# EAGLE board GnZC - POC (EAGLE 9.6.2)
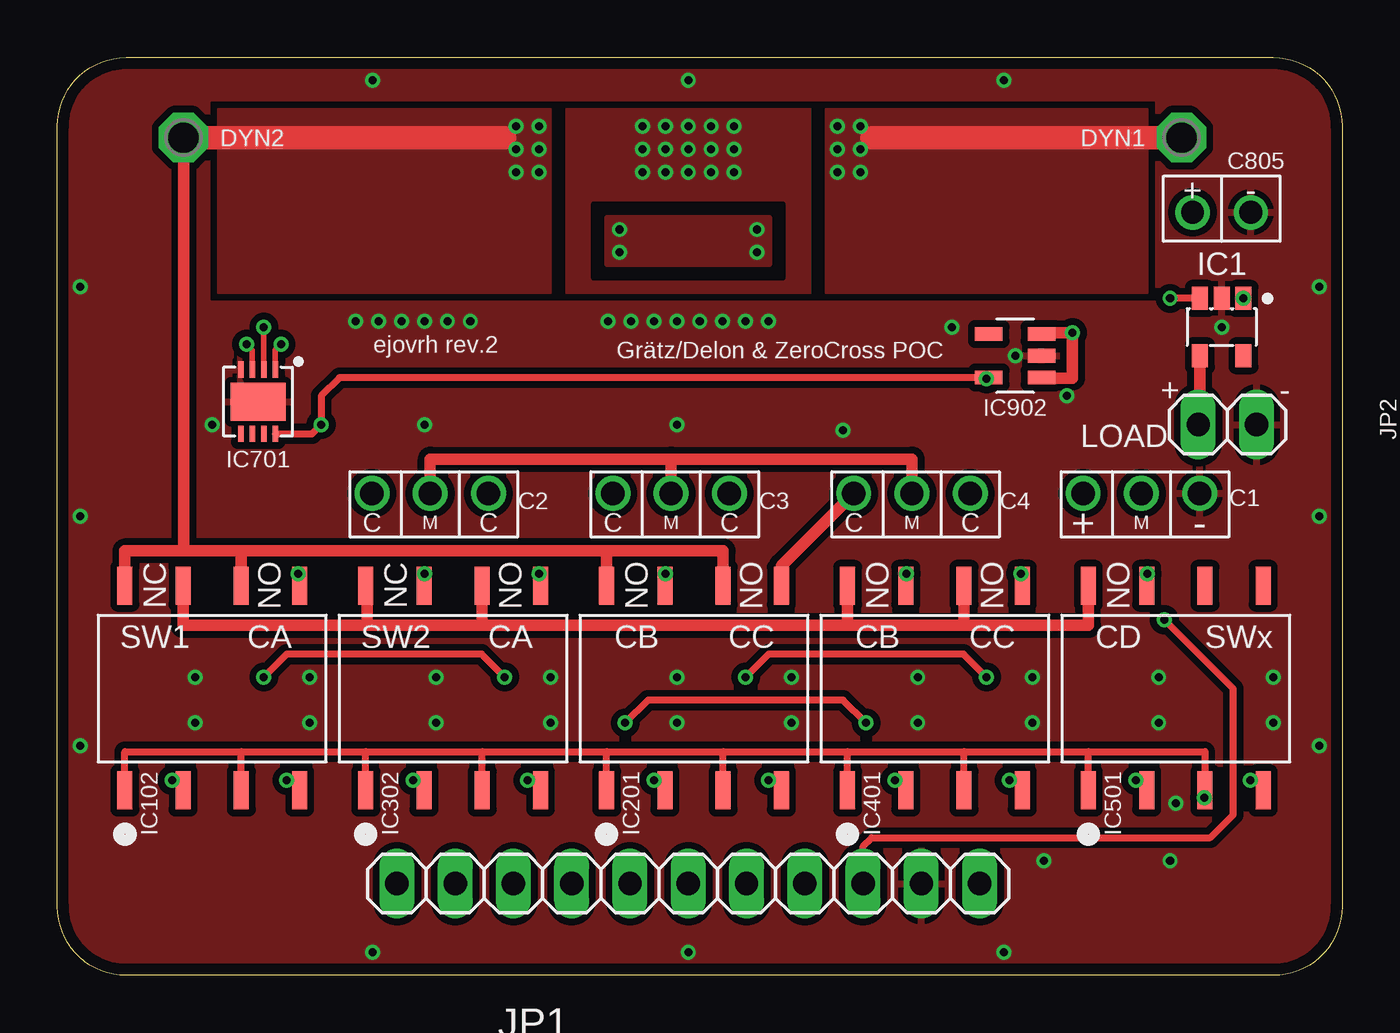
[diagram p0: board, top side]
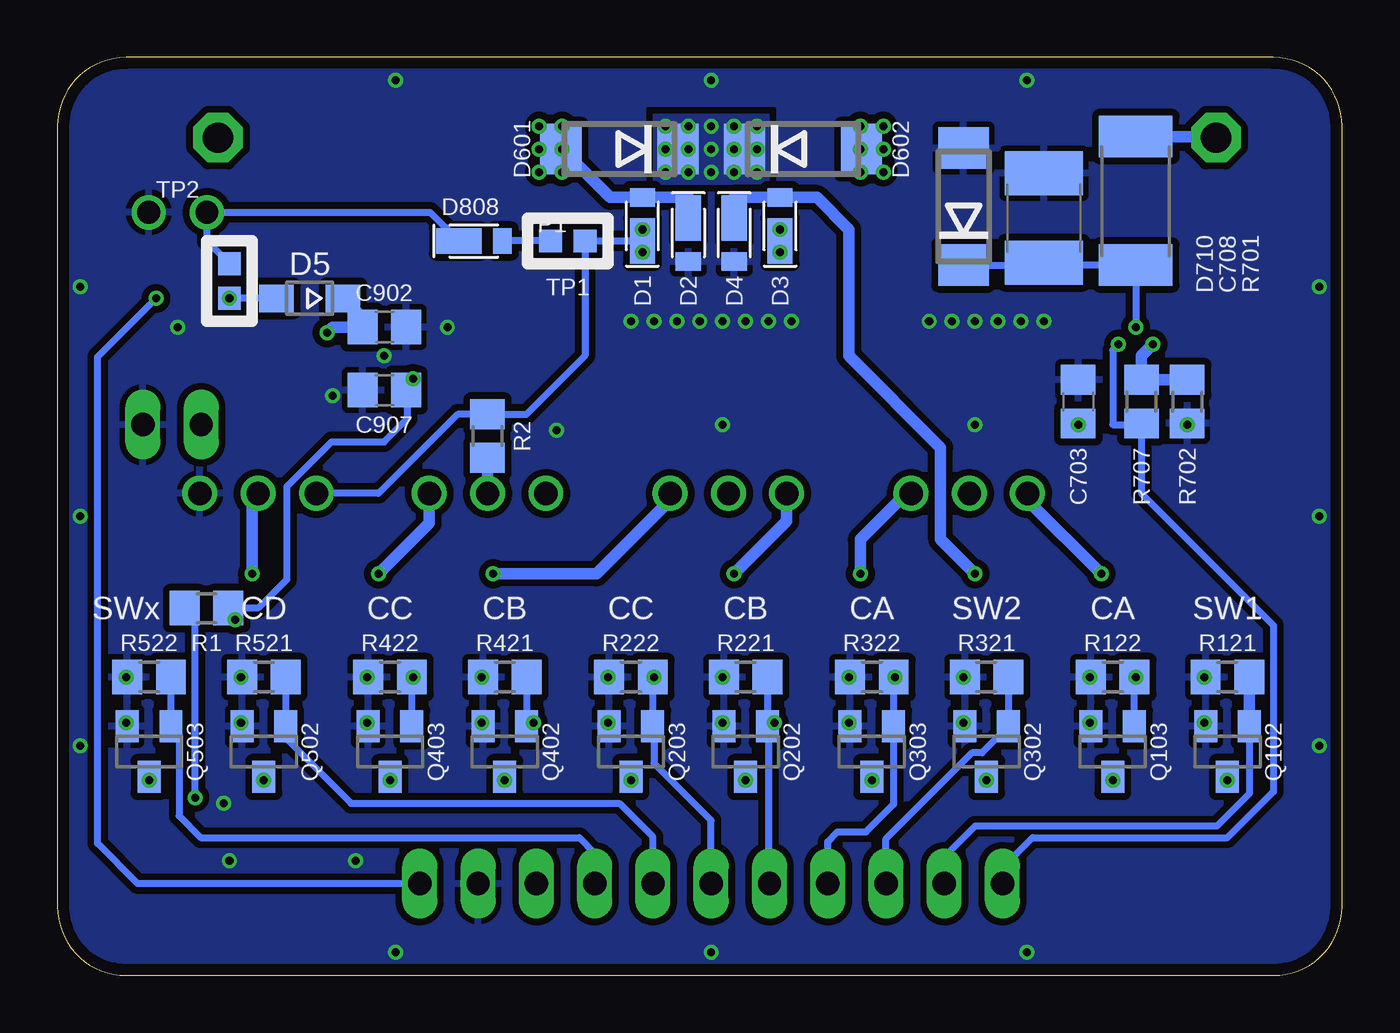
[diagram p1: board, bottom side, seen from below]

Size 56 x 40 mm. Coordinates in mm from the lower left corner, seen from the top.
Outline: 56,37 56,3 arc-90 53,0 3,0 arc-90 0,3 0,37 arc-90 3,40 53,40 arc-90 56,37
Copper layers (1*16): Top 0.035mm / dielectric 1.5mm / Bottom 0.035mm
Design rules "markovac_2layer": minimum track width 0.2mm, minimum drill 0.35mm, track to track 0.2mm, track to pad 0.2mm, pad to pad 0.2mm, via to via 0.2mm, smd to smd 0.2mm, copper to edge 0.5mm, drill to drill 8mil, minimum pad ring 0.15mm, minimum via ring 0.15mm, stop-mask expansion 4mil, vias tented up to drill 0.35mm, thermal gap 10mil
Net classes: 0 GND: width 0.5 mm, drill 0.3 mm, clearance 0.2 mm; 1 DYNAMO_OUT: width 0.5 mm, drill 0.3 mm, clearance 0.2 mm; 2 V_DC: width 0.3 mm, drill 0.3 mm, clearance 0.2 mm; 3 V_REGULATED: width 0.3 mm, drill 0.3 mm, clearance 0.2 mm; 4 Vcc: width 0.3 mm, drill 0.3 mm, clearance 0.2 mm; 5 signal: width 0.3 mm, drill 0.3 mm, clearance 0.2 mm

## Footprints (pad centres in the part's own frame; a part is rotated, then mirrored left to right if it is on the bottom)
TH-2S = drill 1.016: 1_POS -2.54,0; 2_MID 0,0; 3_NEG 2.54,0
TH-2S-BACK-TO-BACK = drill 1.016: 1_C -2.54,0; 2_MID 0,0; 3_C 2.54,0
C0805 = smd 1.3 x 1.5: 1 -0.95,0; 2 0.95,0
C1812 = smd 1.9 x 3.4: 1 -1.95,0; 2 1.95,0
TH = drill 1: NEG -1.27,0; POS 1.27,0
US2H = smd 2 x 1.1: A -1,0 | smd 0.8 x 1.1: C 0.9,0
SOD323-W = smd 1.5 x 1.2: A 1.45,0; C -1.45,0
DO214AA = smd 1.8 x 2.2: A 2.55,0; C -2.55,0
SOT-23-5 = smd 0.7 x 1: P$1 0.95,1.25; P$2 0,1.25; P$3 -0.95,1.25; P$4 -0.95,-1.25; P$5 0.95,-1.25
SMD_DIP8 = smd 0.65 x 1.65: 1_ANODE1 -3.81,-4.44; 2_CATHODE1 -1.27,-4.44; 3_ANODE2 1.27,-4.44; 4_CATHODE2 3.81,-4.44; 5_DRAIN2-1 3.81,4.48; 6_DRAIN2-2 1.27,4.48; 7_DRAIN1-1 -1.27,4.48; 8_DRAIN1-2 -3.81,4.48
DFN-8 = smd 0.25 x 0.7: 1_A_OUT -0.75,-1.4; 2_A_IN- -0.25,-1.4; 3_A_IN+ 0.25,-1.4; 4_V- 0.75,-1.4; 5_B_IN+ 0.75,1.4; 6_B_IN- 0.25,1.4; 7_B_OUT -0.25,1.4; 8_V+ -0.75,1.4 | smd 2.38 x 1.65: 9_V- 0,0
SOT-23-5L = smd 0.6 x 1.2: ADJ/NC -0.95,-1.15; EN -0.95,1.15; GND 0,1.15; IN 0.95,1.15; OUT 0.95,-1.15
1X11 = drill 1.016 long: 1 -12.7,0; 2 -10.16,0; 3 -7.62,0; 4 -5.08,0; 5 -2.54,0; 6 0,0; 7 2.54,0; 8 5.08,0; 9 7.62,0; 10 10.16,0; 11 12.7,0
1X02 = drill 1.016 long: 1 -1.27,0; 2 1.27,0
SOT23 = smd 1 x 1.4: 1 -0.95,-1.1; 2 0.95,-1.1; 3 0,1.1
R0805 = smd 1.3 x 1.5: 1 -0.95,0; 2 0.95,0
R2512 = smd 1.8 x 3.2: 1 -2.8,0; 2 2.8,0
P1-13 = drill 1.321 pad 2.159 octagon: TP 0,0
TP10SQ = smd 1 x 1: TP 0,0

## Placement (x,y rotation side)
C1  330μF / 35V / ultralow ESR  [TH-2S]  47.25,21 0 top
C2  1500μF / 35V / ultralow ESR  [TH-2S-BACK-TO-BACK]  16.25,21 0 top
C3  1500μF / 35V / ultralow ESR  [TH-2S-BACK-TO-BACK]  26.75,21 0 top
C4  1500μF / 35V / ultralow ESR  [TH-2S-BACK-TO-BACK]  37.25,21 0 top
C703  0.1uF / 10V  [C0805]  11.5,25 270 bottom
C708  10nF / 100v  [C1812]  13,33 270 bottom
C805  2P 4700μF / 35V / ultralow ESR  [TH]  50.75,33.25 180 top
C902  1uF / 10V  [C0805]  41.75,28.25 0 bottom
C907  1uF / 10V  [C0805]  41.75,25.5 0 bottom
D1  CUHS20S30,H3F  [US2H]  30.5,33 90 bottom
D2  CUHS20S30,H3F  [US2H]  28.5,32 270 bottom
D3  CUHS20S30,H3F  [US2H]  24.5,33 90 bottom
D4  CUHS20S30,H3F  [US2H]  26.5,32 270 bottom
D5  BAT 60A E6327  [SOD323-W]  45,29.5 180 bottom
D601  19V/5W  [DO214AA]  31.5,36 180 bottom
D602  19V/5W  [DO214AA]  23.5,36 0 bottom
D710  6V/3W  [DO214AA]  16.5,33.5 90 bottom
D808  CUHS20S30,H3F  [US2H]  37.5,32 0 bottom
IC1  MIC2514YM5  [SOT-23-5]  50.75,28.25 0 top
IC102  LBA710S  [SMD_DIP8]  6.75,12.5 0 top
IC201  LAA710S  [SMD_DIP8]  27.75,12.5 0 top
IC302  LBA710S  [SMD_DIP8]  17.25,12.5 0 top
IC401  LAA710S  [SMD_DIP8]  38.25,12.5 0 top
IC501  LAA710S  [SMD_DIP8]  48.75,12.5 0 top
IC701  LT1638IDD#PBF  [DFN-8]  8.75,25 180 top
IC902  LDK320AM33R  [SOT-23-5L]  41.75,27 270 top
JP1  out  [1X11]  27.5,4 0 top
JP2  2.54-pinhead  [1X02]  51,24 0 top
Q102  IRLML2402TRPBF  [SOT23]  5,9.75 180 bottom
Q103  IRLML2402TRPBF  [SOT23]  10,9.75 180 bottom
Q202  IRLML2402TRPBF  [SOT23]  26,9.75 180 bottom
Q203  IRLML2402TRPBF  [SOT23]  31,9.75 180 bottom
Q302  IRLML2402TRPBF  [SOT23]  15.5,9.75 180 bottom
Q303  IRLML2402TRPBF  [SOT23]  20.5,9.75 180 bottom
Q402  IRLML2402TRPBF  [SOT23]  36.5,9.75 180 bottom
Q403  IRLML2402TRPBF  [SOT23]  41.5,9.75 180 bottom
Q502  IRLML2402TRPBF  [SOT23]  47,9.75 180 bottom
Q503  IRLML2402TRPBF  [SOT23]  52,9.75 180 bottom
R1  430R/0.5W  [R0805]  49.5,16 0 bottom
R2  47k  [R0805]  37.25,23.5 90 bottom
R121  10k  [R0805]  5,13 180 bottom
R122  10k  [R0805]  10,13 180 bottom
R221  10k  [R0805]  26,13 180 bottom
R222  10k  [R0805]  31,13 180 bottom
R321  10k  [R0805]  15.5,13 180 bottom
R322  10k  [R0805]  20.5,13 180 bottom
R421  10k  [R0805]  36.5,13 180 bottom
R422  10k  [R0805]  41.5,13 180 bottom
R521  10k  [R0805]  47,13 180 bottom
R522  10k  [R0805]  52,13 180 bottom
R701  10k/3W  [R2512]  9,33.75 270 bottom
R702  10k  [R0805]  6.75,25 90 bottom
R707  10k  [R0805]  8.75,25 90 bottom
TP2  dynamo 1  [P1-13]  49,36.5 0 top
TP3  dynamo 2  [P1-13]  5.5,36.5 0 top
TP4  TP1l  [TP10SQ]  33,32 0 bottom
TP5  TP1r  [TP10SQ]  34.5,32 0 bottom
TP6  TP2l  [TP10SQ]  48.5,31 270 bottom
TP7  TP2r  [TP10SQ]  48.5,29.5 270 bottom

## Library data of the parts
C1-C4 C805 = C-Pol
C703 C708 C902 C907 = rcl; SPICEPREFIX: C
D1-D4 D808 = CUHS20S30 - Schottky Barrier Diode
D5 D601 D602 D710 = diode
IC1 = MIC2514 - High-Side load switch
IC102 IC201 IC302 IC401 IC501 = LxA710 - Solid State Relay Form A-AB
IC701 = LT1638 - Rail to Rail OpAmp
IC902 = LDK320 5V LDO
JP1 JP2 = pinhead
Q102 Q103 Q202 Q203 Q302 Q303 Q402 Q403 Q502 Q503 = adafruit
R1 R2 R121 R122 R221 R222 R321 R322 R421 R422 R521 R522 R701 R702 R707 = rcl; SPICEPREFIX: R
TP2-TP7 = testpad

## Nets
+3V3 [Vcc]: C703.2 C907.2 IC701.8_V+ IC902.OUT JP1.9 R1.2
CAA [DYNAMO_OUT]: C2.1_C IC102.5_DRAIN2-1
CAB: C2.3_C IC302.5_DRAIN2-1
CBA [DYNAMO_OUT]: C3.1_C IC201.7_DRAIN1-1
CBB [DYNAMO_OUT]: C3.3_C IC401.7_DRAIN1-1
CCA [DYNAMO_OUT]: C4.1_C IC201.5_DRAIN2-1
CCB [DYNAMO_OUT]: C4.3_C IC401.5_DRAIN2-1
DYNAMO1 [DYNAMO_OUT]: D1.C D2.A D601.A TP2.TP
DYNAMO2_AFTER_TUNING-CAP_SW [DYNAMO_OUT]: IC102.7_DRAIN1-1 IC302.6_DRAIN2-2 IC302.8_DRAIN1-2 IC401.6_DRAIN2-2 IC401.8_DRAIN1-2 IC501.8_DRAIN1-2
DYNAMO2_BEFORE_TUNING-CAP_SW [DYNAMO_OUT]: D602.A IC102.6_DRAIN2-2 IC102.8_DRAIN1-2 IC201.6_DRAIN2-2 IC201.8_DRAIN1-2 R701.1 TP3.TP
DYNAMO2_DELON [DYNAMO_OUT]: C1.2_MID IC501.7_DRAIN1-1
DYNAMO2_GRAETZ [DYNAMO_OUT]: D3.C D4.A IC302.7_DRAIN1-1
GND: C1.3_NEG C703.1 C708.1 C805.NEG C902.2 C907.1 D2.C D4.C D710.A IC1.P$2 IC701.4_V- IC701.9_V- IC902.GND JP1.10 JP2.2 Q102.2 Q103.2 Q202.2 Q203.2 Q302.2 Q303.2 Q402.2 Q403.2 Q502.2 Q503.2 R121.2 R122.2 R221.2 R222.2 R321.2 R322.2 R421.2 R422.2 R521.2 R522.2 R702.1
LDO_IN: C902.1 D5.C IC902.EN IC902.IN
LOAD_HIGHSIDE: IC1.P$4 JP2.1
LOAD_SWITCH [signal]: IC1.P$1 JP1.11
OVP:ZENER_COMMON [DYNAMO_OUT]: D601.C D602.C
SSR_ANODE [V_DC]: IC102.1_ANODE1 IC102.3_ANODE2 IC201.1_ANODE1 IC201.3_ANODE2 IC302.1_ANODE1 IC302.3_ANODE2 IC401.1_ANODE1 IC401.3_ANODE2 IC501.1_ANODE1 IC501.3_ANODE2 R1.1
SSR_NC/NO1:SW1_CAT [signal]: IC102.2_CATHODE1 Q102.3
SSR_NC/NO1:SW2_CAT [signal]: IC102.4_CATHODE2 Q103.3
SSR_NC/NO2:SW1_CAT [signal]: IC302.2_CATHODE1 Q302.3
SSR_NC/NO2:SW2_CAT [signal]: IC302.4_CATHODE2 Q303.3
SSR_NO/NO1:SW1_CAT [signal]: IC201.2_CATHODE1 Q202.3
SSR_NO/NO1:SW2_CAT [signal]: IC201.4_CATHODE2 Q203.3
SSR_NO/NO2:SW1_CAT [signal]: IC401.2_CATHODE1 Q402.3
SSR_NO/NO2:SW2_CAT [signal]: IC401.4_CATHODE2 Q403.3
SSR_NO/NO3:SW1_CAT [signal]: IC501.2_CATHODE1 Q502.3
SSR_NO/NO3:SW2_CAT [signal]: IC501.4_CATHODE2 Q503.3
SSR_NO/NO3:SW2_IN [DYNAMO_OUT]: IC501.6_DRAIN2-2
SSR_NO/NO3:SW2_OUT [DYNAMO_OUT]: IC501.5_DRAIN2-1
SW1_CTRL [signal]: JP1.2 Q102.1 R121.1
SW2_CTRL [signal]: JP1.3 Q302.1 R321.1
SW_CA_CTRL [signal]: JP1.4 Q103.1 Q303.1 R122.1 R322.1
SW_CB_CTRL [signal]: JP1.5 Q202.1 Q402.1 R221.1 R421.1
SW_CC_CTRL [signal]: JP1.6 Q203.1 Q403.1 R222.1 R422.1
SW_CD_CTRL [signal]: JP1.7 Q502.1 R521.1
SW_X_CTRL [signal]: JP1.8 Q503.1 R522.1
TUNING_CAP_BIAS [DYNAMO_OUT]: C2.2_MID C3.2_MID C4.2_MID R2.1
V_RECT_TP1-IN [V_REGULATED]: C1.1_POS D1.A D3.A R2.2 TP4.TP
V_RECT_TP1-OUT [V_REGULATED]: D808.C TP5.TP
V_REGULATED_TP2-IN [Vcc]: C805.POS D808.A TP6.TP
V_REGULATED_TP2-OUT [Vcc]: D5.A IC1.P$3 TP7.TP
ZERO-CROSS_DETECTOR:N$6 [Vcc]: C708.2 D710.C IC701.2_A_IN- R701.2
ZERO-CROSS_DETECTOR:N$12: IC701.3_A_IN+ R702.2 R707.2
ZEROCROSS [signal]: IC701.1_A_OUT JP1.1 R707.1

## Tracks (layer width: path | path; a pad name or v marks a point on that pad's centre or on a via)
+3V3  (via drill 0.35)
  Top 0.3: IC701.8_V+ 11.1,23.6 v11.5,24 11.5,25.25 12.3,26.05 IC902.OUT 40.55,26 v40.5,26 | JP1.9 35.12,5.62 35.5,6 50.25,6 51.25,7 51.25,12.5 v48.25,15.5
  Bottom 0.3: v40.5,26 40.5,25.8 C907.2 40.75,25.45 40.75,24.25 41.75,23.25 44.05,23.25 46,21.3 46,17.25 47.25,16 R1.2 48.25,15.7 v48.25,15.5 | C703.2 v11.5,24
CAA  (via drill 0.35)
  Top 0.5: IC102.5_DRAIN2-1 10.5,17.04 v10.5,17.5
  Bottom 0.5: v10.5,17.5 13.71,20.71 C2.1_C
CAB  (via drill 0.35)
  Top 0.5: IC302.5_DRAIN2-1 21.06,17.44 v21,17.5
  Bottom 0.5: C2.3_C 19,21 21,19 v21,17.5
CBA  (via drill 0.35)
  Top 0.5: IC201.7_DRAIN1-1 26.48,17.48 v26.5,17.5
  Bottom 0.5: v26.5,17.5 24.21,19.79 C3.1_C
CBB  (via drill 0.35)
  Top 0.5: IC401.7_DRAIN1-1 36.98,17.48 v37,17.5
  Bottom 0.5: C3.3_C 29.29,20.71 32.5,17.5 v37,17.5
CCA
  Top 0.5: IC201.5_DRAIN2-1 31.56,17.85 C4.1_C
CCB  (via drill 0.35)
  Top 0.5: IC401.5_DRAIN2-1 42,17.04 v42,17.5
  Bottom 0.5: v42,17.5 39.79,19.71 C4.3_C
DYNAMO1  (via drill 0.35)
  Top 0.5: 35.5,36.5 v35,37
  Top 1.016: TP2.TP 35.5,36.5
  Bottom 0.5: D2.A 28.5,33.9 D1.C 31.9,33.9 v34,36 D601.A
  other vias: 34,37 34,35 35,35 35,36
  pour Top (isolate 0.3, no thermals): 33.5,37.75 47.5,37.75 47.5,29.75 33.5,29.75
DYNAMO2_AFTER_TUNING-CAP_SW
  Top 0.5: IC102.7_DRAIN1-1 5.48,15.25 13.5,15.25 | IC501.8_DRAIN1-2 44.94,15.25 39.52,15.25 | 13.5,15.25 18.52,15.25 | 18.52,15.25 34.44,15.25 | 34.44,15.25 39.52,15.25 | IC401.6_DRAIN2-2 39.52,15.25 | IC401.8_DRAIN1-2 34.44,15.25 | IC302.8_DRAIN1-2 13.5,16.98 13.5,15.25 | IC302.6_DRAIN2-2 18.52,15.25
DYNAMO2_BEFORE_TUNING-CAP_SW  (via drill 0.35)
  Top 0.5: 19.5,36.5 v20,37 | 8.02,18.5 5.5,18.5 | IC102.8_DRAIN1-2 2.94,18.5 5.5,18.5 | IC102.6_DRAIN2-2 8.02,18.5 | IC201.8_DRAIN1-2 23.94,18.5 | 23.94,18.5 8.02,18.5 | IC201.6_DRAIN2-2 29.02,18.5 23.94,18.5 | TP3.TP 5.5,18.5
  Top 1.016: TP3.TP 19.5,36.5
  Bottom 0.5: TP3.TP 5.55,36.55 R701.1 | D602.A v21,36
  other vias: 21,37 20,35 21,35 20,36
  pour Top (isolate 0.3, no thermals): 21.5,37.75 7,37.75 7,29.75 21.5,29.75
DYNAMO2_DELON  (via drill 0.35)
  Top 0.5: IC501.7_DRAIN1-1 47.5,17 v47.5,17.5
  Bottom 0.5: C1.2_MID 47.5,20.75 v47.5,17.5
DYNAMO2_GRAETZ  (via drill 0.35)
  Top 0.5: v16,17.5 16,17 IC302.7_DRAIN1-1
  Bottom 0.5: D4.A 26.5,33.9 D3.C 22.9,33.9 21.5,32.5 21.5,27 17.5,23 17.5,19 v16,17.5
GND  (via drill 0.35)
  Bottom 0.5: Q302.2 16.45,10.95 v16.5,11
  other vias: 41.75,27 27.5,1 27.5,39 1,20 1,30 1,10 13.75,1 41.25,39 41.25,1 55,10 55,20 55,30 13.75,39 44,25.25 24,28.5 25,28.5 26,28.5 27,28.5 28,28.5 29,28.5 30,28.5 31,28.5 6.75,24 15,28.5 13,28.5 14,28.5 16,28.5 17,28.5 18,28.5 6,13 11,13 16.5,13 21.5,13 27,13 32,13 37.5,13 42.5,13 48,13 21.5,11 27,11 32,11 37.5,11 42.5,11 48,11 53,11 53,13 6,11 11,11 16,24 27,24 34.25,23.75 50.75,28.25 39,28.25 43,5 48.5,5 48.75,7.5
  pour Top (isolate 0.3, rank 3): 0,40 56,40 56,0 0,0
  pour Bottom (isolate 0.3, rank 2): 0,40 56,40 56,0 0,0
LDO_IN  (via drill 0.35)
  Top 0.5: IC902.EN 42.95,28 v44.25,28 44.25,26.02 42.92,26.02 IC902.IN
  Bottom 0.5: D5.C 42.7,28.65 C902.1 44,28.25 v44.25,28
LOAD_HIGHSIDE
  Top 0.5: JP2.1 49.73,24.18 49.8,24.18 IC1.P$4
LOAD_SWITCH  (via drill 0.35)
  Bottom 0.3: JP1.11 52.5,4 54.25,5.75 54.25,14 54.25,14.75 54.25,26.95 IC1.P$1
  other vias: 51.7,29.5
OVP:ZENER_COMMON  (via drill 0.35)
  other vias: 27.5,37 27.5,36 27.5,35 26.5,35 26.5,36 26.5,37 25.5,37 25.5,36 25.5,35 28.5,35 28.5,36 28.5,37 29.5,37 29.5,36 29.5,35
  pour Bottom (isolate 0.3, no thermals): 25,37.5 30,37.5 30,34.5 25,34.5
  pour Top (isolate 0.61, rank 2, no thermals): 19.5,37.75 35.5,37.75 35.5,29.75 19.5,29.75
SSR_ANODE  (via drill 0.35)
  Top 0.3: IC102.1_ANODE1 2.94,9.75 8.02,9.75 | IC501.3_ANODE2 50.02,9.75 44.94,9.75 | 8.02,9.75 13.44,9.75 | 13.44,9.75 18.52,9.75 | 18.52,9.75 23.94,9.75 | 23.94,9.75 29.02,9.75 | 29.02,9.75 34.44,9.75 | 34.44,9.75 39.52,9.75 | 39.52,9.75 44.94,9.75 | IC501.1_ANODE1 44.94,9.75 | IC401.3_ANODE2 39.52,9.75 | IC201.3_ANODE2 29.02,9.75 | IC401.1_ANODE1 34.44,9.75 | IC201.1_ANODE1 23.94,9.75 | IC302.3_ANODE2 18.52,9.75 | IC302.1_ANODE1 13.44,9.75 | IC102.3_ANODE2 8.02,9.75
  Top 0.5: IC501.3_ANODE2 50.02,7.77 v50,7.75
  Bottom 0.3: v50,7.75 50,15.55 R1.1
SSR_NC/NO1:SW1_CAT  (via drill 0.35)
  Top 0.3: v5,8.5 5.48,8.5 IC102.2_CATHODE1
  Bottom 0.3: Q102.3 v5,8.5
SSR_NC/NO1:SW2_CAT  (via drill 0.35)
  Top 0.3: v10,8.5 10.56,8.5 IC102.4_CATHODE2
  Bottom 0.3: Q103.3 v10,8.5
SSR_NC/NO2:SW1_CAT  (via drill 0.35)
  Top 0.3: v15.5,8.5 15.98,8.5 IC302.2_CATHODE1
  Bottom 0.3: Q302.3 v15.5,8.5
SSR_NC/NO2:SW2_CAT  (via drill 0.35)
  Top 0.3: v20.5,8.5 21.06,8.5 IC302.4_CATHODE2
  Bottom 0.3: Q303.3 v20.5,8.5
SSR_NO/NO1:SW1_CAT  (via drill 0.35)
  Top 0.3: v26,8.5 26.48,8.5 IC201.2_CATHODE1
  Bottom 0.3: Q202.3 v26,8.5
SSR_NO/NO1:SW2_CAT  (via drill 0.35)
  Top 0.3: v31,8.5 31.56,8.5 IC201.4_CATHODE2
  Bottom 0.3: Q203.3 v31,8.5
SSR_NO/NO2:SW1_CAT  (via drill 0.35)
  Top 0.3: v36.5,8.5 36.98,8.5 IC401.2_CATHODE1
  Bottom 0.3: Q402.3 v36.5,8.5
SSR_NO/NO2:SW2_CAT  (via drill 0.35)
  Top 0.3: v41.5,8.5 42.06,8.5 IC401.4_CATHODE2
  Bottom 0.3: Q403.3 v41.5,8.5
SSR_NO/NO3:SW1_CAT  (via drill 0.35)
  Top 0.3: v47,8.5 47.48,8.5 IC501.2_CATHODE1
  Bottom 0.3: Q502.3 v47,8.5
SSR_NO/NO3:SW2_CAT  (via drill 0.35)
  Top 0.3: v52,8.5 52.56,8.5 IC501.4_CATHODE2
  Bottom 0.3: Q503.3 v52,8.5
SW1_CTRL
  Bottom 0.3: Q102.1 4.05,7.91 5.46,6.5 16,6.5 17.34,5.16 JP1.2
  Bottom 0.5: Q102.1 R121.1
SW2_CTRL
  Bottom 0.3: R321.1 Q302.1 15.7,9.7 16.14,9.7 19.88,5.96 JP1.3
SW_CA_CTRL  (via drill 0.35)
  Top 0.3: v9,13 10,14 18.5,14 v19.5,13
  Bottom 0.3: Q103.1 R122.1 v9,13 | v19.5,13 R322.1 Q303.1 19.55,7.45 20.75,6.25 22,6.25 22.42,5.83 JP1.4
SW_CB_CTRL  (via drill 0.35)
  Top 0.3: v35.25,11 34.25,12 25.75,12 v24.75,11
  Bottom 0.3: R221.1 Q202.1 | R421.1 Q402.1 35.4,11 v35.25,11 | Q202.1 24.9,11 v24.75,11 | JP1.5 25,4.04 25,10.85 Q202.1
SW_CC_CTRL  (via drill 0.35)
  Top 0.3: v30,13 31,14 39.5,14 v40.5,13
  Bottom 0.3: Q403.1 R422.1 v40.5,13 | v30,13 R222.1 Q203.1 30,10.8 30,9.25 27.5,6.75 JP1.6
SW_CD_CTRL
  Bottom 0.3: R521.1 Q502.1 46.05,10.35 43.2,7.5 31.5,7.5 30.04,6.04 JP1.7
SW_X_CTRL
  Bottom 0.3: R522.1 Q503.1 50.7,10.5 50.7,6.95 49.75,6 33.25,6 32.58,5.33 JP1.8
TUNING_CAP_BIAS
  Top 0.5: C2.2_MID 16.25,22.5 26.75,22.5 | C4.2_MID 37.25,22.5 26.75,22.5 | C3.2_MID 26.75,22.5
  Bottom 0.5: C4.2_MID R2.1
V_RECT_TP1-IN  (via drill 0.35)
  Bottom 0.3: v30.5,31.5 D1.A TP4.TP 33,27 35.55,24.45 R2.2 38.55,24.45 42,21 C1.1_POS | D3.A v24.5,31.5
  Bottom 0.5: 24.45,31.95 D3.A
  other vias: 24.5,32.5 30.5,32.5
  pour Top (no thermals): 24,33 31,33 31,31 24,31
V_RECT_TP1-OUT
  Bottom 0.3: TP5.TP D808.C
V_REGULATED_TP2-IN
  Bottom 0.3: D808.A 39.75,33.25 C805.POS 49.48,31.98 TP6.TP
V_REGULATED_TP2-OUT  (via drill 0.35)
  Top 0.3: IC1.P$3 TP7.TP
  Bottom 0.3: D5.A TP7.TP
  other vias: 48.5,29.5
ZERO-CROSS_DETECTOR:N$6  (via drill 0.35)
  Top 0.25: v9,28.25 IC701.2_A_IN-
  Bottom 0.3: D710.C 13,30.95 | C708.2 13,30.95 | 13,30.95 R701.2 v9,28.25
ZERO-CROSS_DETECTOR:N$12  (via drill 0.35)
  Top 0.25: IC701.3_A_IN+ 8.5,27.25 v8.25,27.5
  Bottom 0.5: R702.2 R707.2 8.75,27 v8.25,27.5
ZEROCROSS  (via drill 0.35)
  Top 0.25: IC701.1_A_OUT 9.5,27.25 v9.75,27.5
  Bottom 0.3: v9.75,27.5 10,27.25 10,24 8.75,24 R707.1 8.75,21 3,15.25 3,8 5,6 13.5,6 14.8,4.7 JP1.1

## Text on the board
tPlace: DYN2 | DYN1 | ejovrh rev.2 | Grätz/Delon & ZeroCross POC | NC | NO | NC | NO | NO | NO | NO | NO | NO | SW1 | CA | SW2 | CA | CB | CC | CB | CC | CD | SWx
bPlace: TP2 | TP1 | TP1 | SW1 | CA | SW2 | CA | CB | CC | CB | CC | CD | SWx
tNames: + | - | LOAD